# Altium PCB Roll_Paper_Motor.PcbDoc
Units mm, origin at the board's own origin, x right, y up, seen from the top; angles counter-clockwise.
Board outline 90.2 x 60.2 mm, 2 copper layers (Top Layer, Bottom Layer); 80 components, 43 nets, 263 pads, 230 vias.
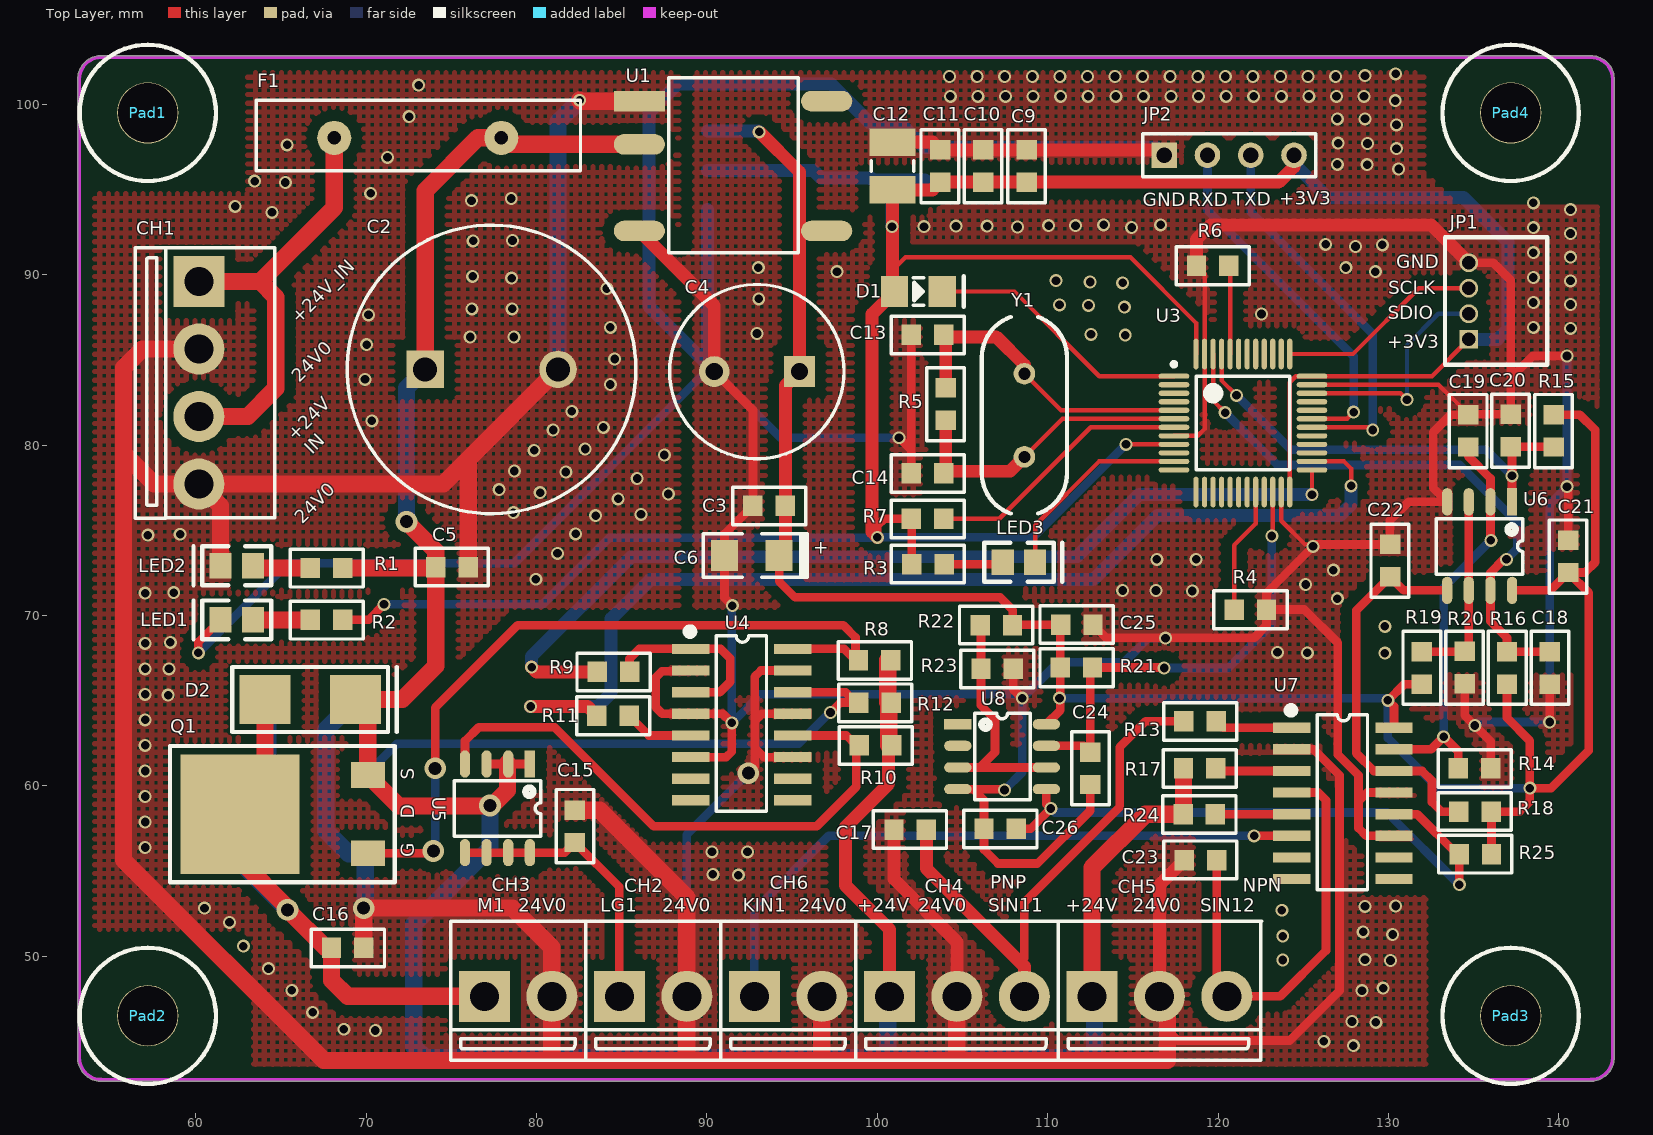
[diagram p0: Top Layer view]
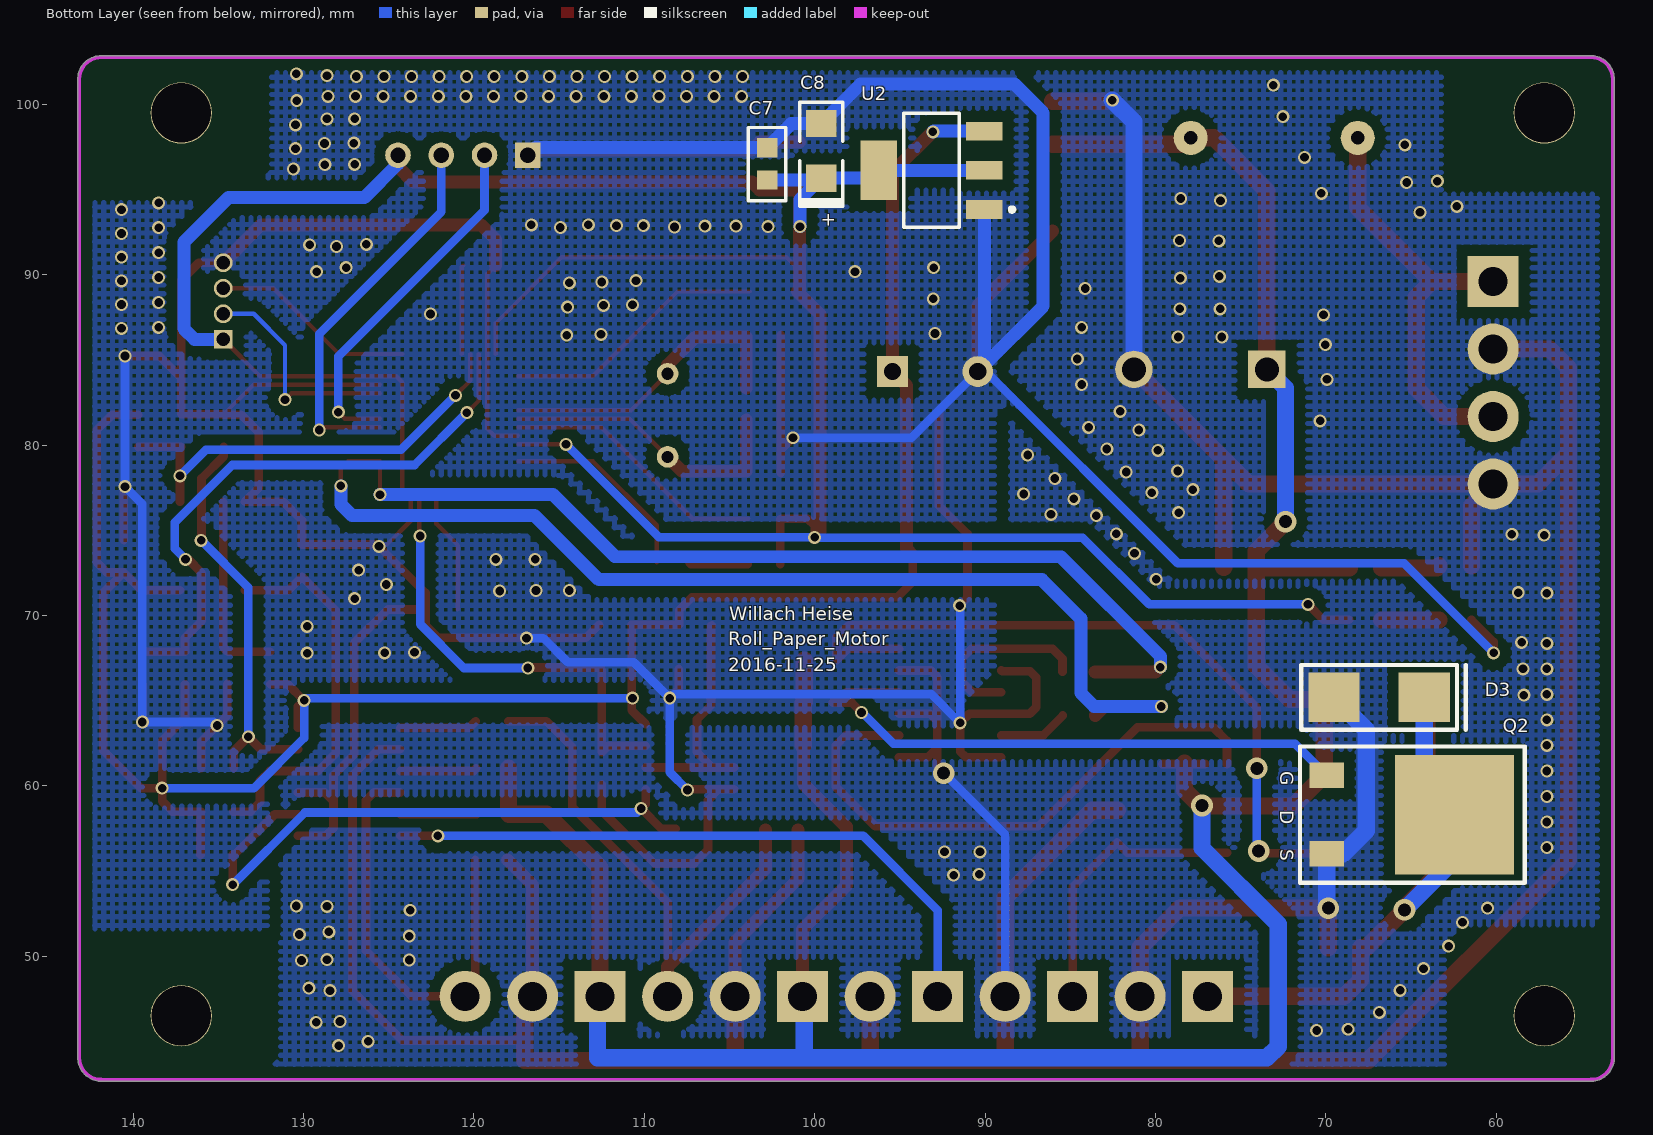
[diagram p1: Bottom Layer view, seen from below]

## Layer stack, top to bottom
Top Solder: solder mask 0.0102, Solder Resist, Dk 3.5
Top Layer: signal copper 0.0356
Dielectric 1: dielectric 0.32, FR-4, Dk 4.8
Bottom Layer: signal copper 0.0356
Bottom Solder: solder mask 0.0102, Solder Resist, Dk 3.5

## Board outline
53.062,43.891 53.062,101.575 cw(c53.162,101.575) 53.066,101.603 cw(c54.432,101.498) 54.26,102.858 cw(c54.305,102.768) 54.305,102.869 141.884,102.869 cw(c141.884,101.498) 143.253,101.566 cw(c143.162,101.524) 143.262,101.524 143.262,44.018 cw(c143.162,44.018) 143.253,43.976 cw(c141.884,44.044) 142.037,42.682 cw(c141.986,42.768) 141.986,42.668 54.432,42.668 cw(c54.432,42.768) 54.399,42.674 cw(c54.432,44.044) 53.077,43.837 cw(c53.162,43.891)

## Design rules (kind name [scope] priority, off if disabled: settings)
Clearance Clearance_1 [InPolygon] p1: gap=0.635
Clearance [All] p2: gap=0.178
ComponentClearance [All] p1: gap=0 collisioncheckmode=3 verticalgap=0 showdistances=FALSE
PolygonConnect [All] p1: connectstyle=Direct reliefconductorwidth=0.254 reliefentries=4 polygonreliefangle="90 Angle" airgapwidth=0.254
RoutingVias [All] p1: holewidth=0.711 width=1.27 viastyle="Through Hole" minholewidth=0.711 minwidth=1.27 maxholewidth=0.711 maxwidth=1.27
SolderMaskExpansion [All] p1: expansion=0.102
Width [All] p1: maxlimit=1.524 minlimit=0.254 preferedwidth=1.524
28 further rules are at their usual default settings.

## Classes and differential pairs
component class senror_input: C17 C18 C19 C20 C21 C22 C23 C24 C25 C26 CH4 CH5 CH6 R13 R14 R15 R16 R17 R18 R19 R20 R21 R22 R23 R24 R25 U6 U7 U8
component class roll_paper_output: C15 C16 CH2 CH3 D2 D3 Q1 Q2 R8 R9 R10 R11 R12 U4 U5
component class power_cpu: C2 C3 C4 C5 C6 C7 C8 C9 C10 C11 C12 C13 C14 CH1 D1 F1 JP1 JP2 LED1 LED2 LED3 Pad1 Pad2 Pad3 Pad4 R1 R2 R3 R4 R5 R6 R7 U1 U2 U3 Y1

## Components (designator, comment, footprint, x,y, rotation, side; value= is the part's Value field where it differs from the comment)
C2 "C_2200uF" C7.8*17 73.457,84.455 r0 top
C3 "Cap" 0805 93.65,76.454 r0 top
C4 "C_2200uF" C5*10 95.428,84.328 r180 top
C5 "Cap" 0805 75.032,72.847 r180 top
C6 "Cap Pol3" "CAP A-3216" 92.634,73.533 r180 top
C7 "Cap" 0805 102.794,96.52 r270 bottom
C8 "Cap Pol3" "CAP A-3216" 99.619,97.282 r90 bottom
C9 "Cap" 0805 108.763,96.393 r270 top
C10 "Cap" 0805 106.223,96.393 r270 top
C11 "Cap" 0805 103.683,96.393 r270 top
C12 "Cap Pol1" 3225[1210] 100.889,96.393 r90 top
C13 "Cap" 0805 102.951,86.487 r0 top
C14 "Cap" 0805 102.951,78.359 r0 top
C15 "Cap" 0805 82.245,57.633 r90 top
C16 "Cap" 0805 68.91,50.495 r0 top
C17 "Cap" 0805 101.93,57.429 r180 top
C18 "Cap" 0805 139.471,66.929 r90 top
C19 "Cap" 0805 134.696,80.848 r270 top
C20 "Cap" 0805 137.185,80.874 r270 top
C21 "Cap" 0805 140.564,73.482 r270 top
C22 "Cap" 0805 130.099,73.228 r270 top
C23 "Cap" 0805 118.974,55.651 r180 top
C24 "Cap" 0805 112.497,61.036 r90 top
C25 "Cap" 0805 111.709,69.469 r180 top
C26 "Cap" 0805 107.213,57.48 r0 top
CH1 "HEADER1X4" CH3.96-4PIN 60.173,89.611 r270 top
CH2 "HEADER1X2" CH3.96-2PIN 84.861,47.65 r0 top
CH3 "HEADER1X2" CH3.96-2PIN 76.937,47.65 r0 top
CH4 "HEADER1X3" CH3.96-3PIN 100.711,47.65 r0 top
CH5 "HEADER1X3" CH3.96-3PIN 112.598,47.65 r0 top
CH6 "HEADER1X2" CH3.96-2PIN 92.786,47.65 r0 top
D1 "Diode 1N4148" LL34 101.016,89.027 r0 top
D2 "1N5822(SS34)" SMA 64.059,65.075 r0 top
D3 "1N5822(SS34)" SMA 69.52,65.202 r180 bottom
F1 "X30_UF500" X30UF600 68.123,98.044 r0 top
JP1 "4 HEADER" CON4_1.5 134.722,88.468 r90 top
JP2 "4 HEADER" HDR1X4 116.84,97.028 r0 top
LED1 "" LED-0805 63.348,69.748 r180 top
LED2 "" LED-0805 63.348,72.923 r180 top
LED3 "" LED-0805 107.366,73.127 r0 top
Pad1 "Pad" pad35 57.15,99.509 r0 top
Pad2 "Pad" pad35 57.15,46.507 r0 top
Pad3 "Pad" pad35 137.155,46.507 r0 top
Pad4 "Pad" pad35 137.155,99.509 r0 top
Q1 "FR5305 (PMOS-2)" TO-252 66.345,58.344 r90 top
Q2 "FR4105 (NMOS-2)" TO-252 66.192,58.318 r270 bottom
R1 "Res2" 0805 67.666,72.796 r0 top
R2 "Res2" 0805 67.666,69.748 r0 top
R3 "Res2" 0805 102.976,73.025 r180 top
R4 "Res2" 0805 121.895,70.358 r0 top
R5 "Res2" 0805 104.018,82.423 r270 top
R6 "Res2" 0805 119.685,90.551 r0 top
R7 "Res2" 0805 102.951,75.692 r0 top
R8 "Res2" 0805 99.847,67.386 r0 top
R9 "Res2" 0805 84.506,66.7 r0 top
R10 "Res2" 0805 99.898,62.382 r0 top
R11 "Res2" 0805 84.48,64.135 r0 top
R12 "Res2" 0805 99.873,64.897 r0 top
R13 "Res2" 0805 118.948,63.805 r0 top
R14 "Res2" 0805 135.052,61.036 r0 top
R15 "Res2" 0805 139.7,80.848 r270 top
R16 "Res2" 0805 136.965,66.929 r90 top
R17 "Res2" 0805 118.923,61.036 r0 top
R18 "Res2" 0805 135.077,58.496 r180 top
R19 "Res2" 0805 131.953,66.929 r90 top
R20 "Res2" 0805 134.485,66.954 r270 top
R21 "Res2" 0805 111.684,66.954 r0 top
R22 "Res2" 0805 106.985,69.444 r180 top
R23 "Res2" 0805 107.036,66.878 r0 top
R24 "Res2" 0805 118.897,58.344 r0 top
R25 "Res2" 0805 135.103,55.982 r180 top
U1 "B2405XT-2WR2" B2405XT-2WR2 86.03,100.203 r0 top
U2 "AMS1117-3.3" SOT223 93.142,96.139 r90 bottom
U3 "STM32F103C8T6" LQFP48 121.463,81.305 r0 top
U4 "TLP280-4" SO16 92.05,63.602 r0 top
U5 "CEM4435A" SOP8-OP27 79.604,61.29 r270 top
U6 "LM293" SOP8-OP27 137.262,76.683 r270 top
U7 "TLP280-4" SO16 127.33,58.979 r0 top
U8 "LM293" SOP8-OP27 104.724,63.627 r0 top
Y1 "8MHz" XTAL_US 108.636,84.201 r270 top

## Footprints (in the part's own frame and the unit in brackets; to place one, negate y for a bottom-side part, rotate by r counter-clockwise, add the part's x,y. Pads: shape width x height; smd on the part's side, far side on the other; paste and mask are expansions set on the pad)
0805 [mm] "1.14mm,1.2mm,3.05mm"
  rect 1.14x1.2 smd: 1(-0.95,0) 2(0.95,0)
  silkscreen extent -2.13,-1.12 2.16,1.09
3225[1210] [mm] "Chip Resistor; Body 3.2 x 2.5 mm (LxW typ)"
  rect 1.6x2.7 smd: 1(-1.4,0) 2(1.4,0)
  silkscreen extent -0.3,-1.25 0.3,1.25
B2405XT-2WR2 [mm]
  rect 3x1.2 smd: 1(0,0)
  oval 3x1.2 smd: 2(0,-2.54) 4(0,-7.62) 5(11,-7.62) 8(11,0)
  silkscreen extent 1.73,-8.89 9.32,1.37
C5*10 [mm]
  rect 1.8x1.8 hole 1: 1(0,0)
  round 1.8 hole 1: 2(5,0)
  silkscreen extent -2.62,-5.11 7.62,5.11
C7.8*17 [mm]
  rect 2.2x2.2 hole 1.4: 1(0,0)
  round 2.2 hole 1.4: 2(7.8,0)
  silkscreen extent -4.57,-8.47 12.37,8.47
"CAP A-3216" [mm]
  rect 1.6x1.8 smd: 1(-1.6,0) 2(1.6,0)
  silkscreen extent -3.25,-1.27 2.85,1.27
CH3.96-2PIN [mm]
  rect 3x3 hole 1.7: 1(0,0)
  round 3 hole 1.7: 2(3.96,0)
  silkscreen extent -1.98,-3.76 5.94,4.42
CH3.96-3PIN [mm]
  rect 3x3 hole 1.7: 1(0,0)
  round 3 hole 1.7: 2(3.96,0) 3(7.92,0)
  silkscreen extent -1.98,-3.76 9.98,4.42
CH3.96-4PIN [mm]
  rect 3x3 hole 1.7: 1(0,0)
  round 3 hole 1.7: 2(3.96,0) 3(7.92,0) 4(11.887,0)
  silkscreen extent -1.98,-3.73 13.89,4.45
CON4_1.5 [mm]
  rect 1.1x1.1 hole 0.8: 1(-2.25,0)
  round 1.1 hole 0.8: 2(-0.75,0) 3(0.75,0) 4(2.25,0)
  silkscreen extent -3.75,-4.6 3.75,1.4
HDR1X4 [mm]
  rect 1.5x1.5 hole 0.9: 1(0,0)
  round 1.5 hole 0.9: 2(2.54,0) 3(5.08,0) 4(7.62,0)
  silkscreen extent -1.27,-1.27 8.89,1.27
LED-0805 [mm]
  rect 1.3x1.5 smd: 1(0,0) 2(1.9,0)
  silkscreen extent -1.08,-1.14 3.49,1.14
LL34 [mm]
  rect 1.6x1.8 smd: 1(0,0) 2(2.8,0)
  silkscreen extent 1.1,-0.89 4.07,0.89
LQFP48 [mm]
  oval 1.8x0.3 smd: 1(-4.05,2.75) 2(-4.05,2.25) 3(-4.05,1.75) 4(-4.05,1.25) 5(-4.05,0.75) 6(-4.05,0.25) 7(-4.05,-0.25) 8(-4.05,-0.75) 9(-4.05,-1.25) 10(-4.05,-1.75) 11(-4.05,-2.25) 12(-4.05,-2.75) 25(4.05,-2.75) 26(4.05,-2.25) 27(4.05,-1.75) 28(4.05,-1.25) 29(4.05,-0.75) 30(4.05,-0.25) 31(4.05,0.25) 32(4.05,0.75) 33(4.05,1.25) 34(4.05,1.75) 35(4.05,2.25) 36(4.05,2.75)
  oval 0.3x1.8 smd: 13(-2.75,-4.05) 14(-2.25,-4.05) 15(-1.75,-4.05) 16(-1.25,-4.05) 17(-0.75,-4.05) 18(-0.25,-4.05) 19(0.25,-4.05) 20(0.75,-4.05) 21(1.25,-4.05) 22(1.75,-4.05) 23(2.25,-4.05) 24(2.75,-4.05) 37(2.75,4.05) 38(2.25,4.05) 39(1.75,4.05) 40(1.25,4.05) 41(0.75,4.05) 42(0.25,4.05) 43(-0.25,4.05) 44(-0.75,4.05) 45(-1.25,4.05) 46(-1.75,4.05) 47(-2.25,4.05) 48(-2.75,4.05)
  silkscreen extent -4.17,-2.75 2.75,3.57, body extent -3.5,-3.5 3.5,3.5, height 1.6
pad35 [mm]
  round 3.6 hole 3.5: 1(0.025,0)
  silkscreen extent -3.97,-4 4.03,4
SMA [mm]
  rect 3x2.9 smd: 1(0,0) 2(5.3,0)
  silkscreen extent -1.92,-1.91 7.73,1.91
SO16 [mm] "Wide = 6mm"
  rect 2.2x0.6 smd: 1(-3,4.445) 2(-3,3.175) 3(-3,1.905) 4(-3,0.635) 5(-3,-0.635) 6(-3,-1.905) 7(-3,-3.175) 8(-3,-4.445) 9(3,-4.445) 10(3,-3.175) 11(3,-1.905) 12(3,-0.635) 13(3,0.635) 14(3,1.905) 15(3,3.175) 16(3,4.445)
  silkscreen extent -3.23,-5.08 1.45,5.64
SOP8-OP27 [mm]
  rect 1.6x0.6 smd: 1(0,0)
  oval 1.6x0.6 smd: 2(0,-1.27) 3(0,-2.54) 4(0,-3.81) 5(5.2,-3.81) 6(5.2,-2.54) 7(5.2,-1.27) 8(5.2,0)
  silkscreen extent 0.99,-4.44 4.24,0.64
SOT223 [mm] "SOT-223/SC-73; 4 Leads; Body 6.7 x 7.3 mm, inc. leads (LxW max)"
  rect 1.1x2.15 smd: 1(-2.3,-3.1) 2(0,-3.1) 3(2.3,-3.1)
  rect 3.5x2.15 smd: 4(0,3.1)
  silkscreen extent -3.35,-4.85 3.35,1.63
TO-252 [mm]
  rect 1.5x2 smd: 1(-2.3,-3.75) 3(2.3,-3.75)
  rect 7x7 smd: 2(0,3.75)
  silkscreen extent -4,-5.32 4,7.87
X30UF600 [mm]
  round 2 hole 0.8: 1(0,0) 2(9.804,0)
  silkscreen extent -4.57,-1.93 14.45,2.21
XTAL_US [mil]
  round 50 hole 28: 1(0,0) 2(192.13,0)
  silkscreen extent -131,-98 323,98

## Part data
C3 C5 C7 C9 C10 C11 C13 C14 C15 C16 C17 C18 C19 C20 C21 C22 C23 C24 C25 C26: "Capacitor"
C6 C8: "Polarized Capacitor (Surface Mount)"
C12: "Polarized Capacitor (Radial)"
D1: "High Conductance Fast Diode"
D2 D3: library part "Diode 1N4148", "High Conductance Fast Diode"
F1: library part "Fuse 1", "Fuse"
JP1 JP2: "4 Pin Header"
LED1 LED2 LED3: library part LED2, "Typical RED, GREEN, YELLOW, AMBER GaAs LED"
Q1: library part PMOS-2, "P-Channel Power MOSFET"
Q2: library part NMOS-2, "N-Channel Power MOSFET"
R1 R2 R3 R4 R5 R6 R7 R8 R9 R10 R11 R12 R13 R14 R15 R16 R17 R18 R19 R20 R21 R22 R23 R24 R25: "Resistor"
U2: library part AMS1117-5
U4 U7: library part TLP521-4
Y1: library part XTAL, "Crystal Oscillator"

## Via types
v1: diameter 0.762, hole 0.508, Top Layer to Bottom Layer, 223 vias
v2: diameter 1.27, hole 0.762, Top Layer to Bottom Layer, 7 vias

## Nets (pads, with @x,y where several pads share a name; then routed paths per layer and width w, separated by ;. In a path a pad name is that pad's centre, name@x,y a point inside that pad or via, vN(x,y) a via of type N, cw(c..) or ccw(c..) an arc to the next point about the centre after c; other vN are vias at no path point)
24V0: C2.2 C5.1 C15.2 C16.2 C17.2 C23.2 CH1.2 CH1.4 CH2.2 CH3.2 CH4.2 CH5.2 CH6.2 D3.1 LED2.2 Q2.3 U1.1 U4.11 U4.13 U4.15 U7.2 | length 301.5
  Top Layer w0.508: v2(92.431,60.757) 92.812,61.138 92.812,62.23 ; U4.11 93.345,61.697 92.812,62.23 ; U4.13 93.218,64.237 92.812,63.83 ; U4.15 93.167,66.777 92.812,66.421 92.812,63.83 ; 117.018,45.695 117.653,45.06 124.206,45.06 127.127,47.981 127.127,60.63 125.603,62.154 U7.2 ; 92.812,62.23 92.812,63.83
  Top Layer w0.762: C17.2 100.98,54.544 104.671,50.853 CH4.2 ; CH5.2 116.558,54.186 C23.2
  Top Layer w1.016: CH1.2 56.848,85.651 55.753,84.557 55.753,79.527 ; LED2.2 61.448,76.449 CH1.4 ; C16.2 69.86,52.822 v2(69.85,52.832) 78.588,52.832 80.897,50.523 CH3.2 80.897,44.046 81.051,43.891 ; C5.1 75.982,79.18 ; C2.2 75.982,79.18 ; C15.2 83.708,58.583 88.821,53.469 CH2.2 88.821,44.071 89.002,43.891 ; v1(82.525,100.254) 82.575,100.203 U1.1 ; CH6.2 96.746,44.198 97.053,43.891 ; CH4.2 104.671,44.173 104.953,43.891 ; CH5.2 117.018,47.191 117.018,45.695 117.018,43.891 104.953,43.891 ; 55.753,79.527 57.556,77.724 CH1.4 ; 55.753,79.527 55.753,55.651 67.513,43.891 81.051,43.891 ; CH1.4 74.526,77.724 75.982,79.18 ; 81.051,43.891 89.002,43.891 ; 89.002,43.891 97.053,43.891 ; 97.053,43.891 104.953,43.891
  Bottom Layer w0.508: CH2.2 88.821,57.148 v2(92.431,60.757)
  Bottom Layer w1.016: D3.1 67.615,63.297 67.615,57.379 68.975,56.018 Q2.3 69.942,52.924 v2(69.85,52.832) ; C2.2 81.257,98.986 v1(82.525,100.254)
  other v1: 127.94,44.755 126.213,45.009 70.536,45.644 68.682,45.72 129.261,46.126 127.864,46.177 66.853,46.711 128.448,47.981 65.634,48.006 129.692,48.133 64.262,49.276 130.124,49.759 123.8,49.784 128.626,49.809 62.789,50.597 123.8,51.181 130.251,51.283 128.524,51.435 61.976,51.994 123.749,52.705 60.503,52.832 128.626,52.934 130.429,52.959 91.846,54.762 90.348,54.813 90.297,56.134 92.38,56.134 57.023,56.388 57.023,57.887 57.023,59.385 57.023,60.884 57.023,62.382 57.023,63.881 58.369,65.329 57.023,65.38 57.023,66.878 58.42,66.878 57.023,68.377 58.496,68.428 57.023,71.323 58.699,71.349 79.959,72.136 81.229,73.66 57.175,74.727 59.08,74.778 82.296,74.803 83.464,75.87 86.131,75.946 78.638,76.048 84.785,76.86 87.732,77.14 80.213,77.216 77.8,77.394 85.903,78.054 81.712,78.435 78.689,78.486 87.503,79.426 79.858,79.705 82.855,79.781 80.975,80.899 83.922,81.051 70.333,81.432 82.067,81.991 84.328,83.566 69.926,83.871 84.582,85.065 70.028,85.903 76.098,86.36 78.664,86.36 84.328,86.919 70.129,87.655 76.2,88.011 78.562,88.011 84.125,89.205 78.537,89.814 76.251,89.916 76.276,91.999 78.588,92.024 64.465,93.675 62.306,94.031 76.175,94.361 78.511,94.488 70.256,94.793 65.253,95.428 63.449,95.504 71.247,96.901 65.354,97.638 72.517,99.289 73.076,101.143
+3.3V: C7.2 C8.1 C9.2 C10.2 C11.2 C12.1 D1.1 JP1.1 JP2.4 R2.2 R3.2 R7.1 U2.2 U2.4 U3.9 U3.24 U3.36 U3.48 | length 182.9
  Top Layer w0.254: 100.889,90.272 101.651,91.034 114.859,91.034 118.713,87.18 U3.48 ; v1@114.579,80.035 v1(114.599,80.055) U3.9 ; U3.24 124.213,83.7 124.568,84.055 U3.36 132.559,84.055 JP1.1
  Top Layer w0.508: R2.2 70.129,69.748 v1(71.044,70.663) ; v1(100,74.6) 100,75.286 100.406,75.692 R7.1 102.026,75.667 R3.2
  Top Layer w0.762: v1(100,74.6) 99.695,74.905 99.695,87.706 D1.1 100.889,89.154 100.889,90.272 C12.1 103.233,94.993 C11.2 C10.2 C9.2 123.561,95.443 124.46,96.342 JP2.4
  Bottom Layer w0.508: v1(71.044,70.663) 80.366,70.663 84.277,74.574 99.974,74.574 v1(100,74.6) 109.144,74.6 v1(114.599,80.055)
  Bottom Layer w0.762: U2.2 U2.4 96.699,95.682 C8.1 C8.1@99.731,95.57 ; v1(100.863,92.837) 100.863,94.437 C8.1@99.731,95.57 ; C7.2 C8.1@99.731,95.57 ; JP2.4 124.46,96.52 126.441,94.539 134.417,94.539 137.033,91.923 137.033,86.843 136.409,86.218 JP1.1
+5V: C3.2 C4.1 C6.1 C21.2 C25.2 R15.1 R16.1 R18.1 R19.1 R21.1 R22.1 R25.1 U1.5 U2.3 U6.8 U7.16 U8.8 | length 134.3
  Top Layer w0.508: C6.1 94.234,72.009 95.174,71.069 107.213,71.069 107.96,70.322 107.96,69.469 C25.2 110.734,69.444 R21.1 110.734,64.437 U8.8 ; U7.16 130.33,64.666 v1(129.972,65.024) 130.927,65.979 R19.1 ; R25.1 136.053,58.471 R18.1 137.693,58.496 138.303,59.106 v1(138.303,59.868) ; R16.1 136.965,64 138.303,62.662 v1(138.303,59.868) ; U6.8 139.514,71.483 C21.2 ; R15.1 141.239,81.798 142.138,80.899 142.138,73.127 141.544,72.532 C21.2 ; v1(138.303,59.868) 139.548,59.868 141.757,62.078 141.757,71.338 C21.2
  Top Layer w0.762: v1(93.066,98.4) 95.428,96.037 C4.1 94.6,83.5 C3.2 94.6,73.899 C6.1
  Bottom Layer w0.508: v1(110.693,65.151) 129.845,65.151 v1(129.972,65.024) 129.972,62.814 132.918,59.868 v1(138.303,59.868)
  Bottom Layer w0.762: U2.3 93.026,98.439 v1(93.066,98.4)
+24V: C2.1 C5.2 CH4.1 CH5.1 D2.2 F1.2 Q1.3 R1.2 R8.2 R10.2 R12.2 R17.1 R24.1 U1.2 U5.1 U5.2 U5.3 | length 174.6
  Top Layer w0.508: U5.3 78.293,61.29 U5.2 U5.1
  Top Layer w0.762: R10.2@100.67,62.382 100.67,60.132 98.146,57.607 98.146,54.153 100.711,51.587 CH4.1
  Top Layer w1.016: R1.2 74.031,72.796 C5.2 ; v2(72.365,75.514) 74.082,73.797 C5.2 ; C2.1 73.457,94.945 76.556,98.044 F1.2 78.308,97.663 U1.2 ; U5.2@78.293,61.331 78.293,61.29 78.293,59.751 77.368,58.826 71.912,58.826 Q1.3 70.095,64.339 D2.2 72.111,65.075 74.082,67.046 C5.2 ; R8.2@100.62,67.386 100.62,64.922 100.645,64.897 100.67,64.872 R10.2@100.67,62.382 ; CH5.1 112.598,55.194 115.748,58.344 R24.1 117.973,58.369 R17.1
  Bottom Layer w1.016: v2(72.365,75.514) 72.365,83.363 C2.1 ; v2(77.267,58.852) 77.267,56.363 72.796,51.892 72.796,44.704 73.457,44.044 100.609,44.044 ; CH4.1 100.609,47.549 100.609,44.044 ; CH5.1 112.751,47.498 112.751,44.044 100.609,44.044
+24V_IN: CH1.1 CH1.3 F1.1 | length 25.7
  Top Layer w1.016: CH1.3 63.048,81.691 64.694,83.337 64.694,88.697 63.779,89.611 ; CH1.1 63.779,89.611 ; F1.1 68.123,93.955 63.779,89.611
GND: C3.1 C4.2 C6.2 C7.1 C8.2 C9.1 C10.1 C11.1 C12.2 C13.1 C14.1 C18.1 C19.1 C20.1 C21.1 C22.1 C24.1 C25.1 C26.1 JP1.4 JP2.1 LED1.2 R4.2 R6.1 R14.2 R20.2 R23.2 U1.4 U2.1 U3.8 U3.23 U3.35 U3.47 U4.2 U4.4 U4.6 U6.4 U7.11 U7.13 U8.4 | length 386.4
  Top Layer w0.254: U3.8 118.808,80.555 119.213,80.96 U3.47 119.213,90.073 R6.1 ; U3.23 123.713,75.576 125.11,74.178 v1@125.689,74.178 ; U3.35 132.939,83.555 C19.1
  Top Layer w0.508: v1(60.147,67.818) 60.147,68.448 LED1.2 ; U4.6 91.135,61.697 91.465,62.027 v1(91.465,63.703) 90.932,64.237 U4.4 87.376,64.237 86.995,64.618 86.995,66.37 87.351,66.726 88.999,66.726 U4.2 ; C4.2 92.7,82.056 C3.1 91.034,74.788 C6.2 91.034,71.044 v1(91.491,70.587) ; v1(101.27,80.442) 102.001,79.711 ; C14.1 102.001,79.711 ; C13.1 102.001,79.711 ; U8.4 105.613,59.817 ; v1(107.467,59.766) 107.417,59.817 105.613,59.817 ; R23.2 107.986,65.674 v1(108.509,65.151) ; C24.1 112.497,58.547 109.398,55.448 107.086,55.448 106.263,56.271 C26.1 106.263,59.167 105.613,59.817 ; C25.1 113.421,68.707 122.123,68.707 122.845,69.428 R4.2 ; U7.11 128.702,57.074 128.245,57.531 128.245,59.106 ; U7.13 128.753,59.614 128.245,59.106 ; R20.2 134.485,64.143 v1(135.077,63.551) 136.002,62.626 R14.2 ; JP1.4 136.155,90.718 137.185,89.687 137.185,83.947 ; v1(139.471,63.754) C18.1 ; v1(140.487,77.572) 140.564,77.495 C21.1 ; v1(140.487,85.242) 138.481,85.242 137.185,83.947 ; R4.2 125.07,70.358 127.025,68.402 127.025,61.849 128.245,60.63 128.245,59.106 ; R4.2 122.845,71.333 125.689,74.178 C22.1 130.099,75.59 131.191,76.683 U6.4 132.639,77.495 132.639,80.772 133.665,81.798 C19.1 134.722,81.824 C20.1 137.185,83.947
  Top Layer w0.762: U1.4 90.428,88.185 C4.2 ; C12.2 103.233,97.793 C11.1 C10.1 C9.1 116.525,97.343 JP2.1 ; R6.1 118.735,92.09 119.583,92.939 132.501,92.939 JP1.4
  Bottom Layer w0.508: v1(60.147,67.818) 65.405,73.076 78.689,73.076 89.941,84.328 C4.2 94.314,80.442 v1(101.27,80.442) ; v1(91.491,70.587) 91.465,70.561 v1(91.465,63.703) 93.142,65.38 108.28,65.38 v1(108.509,65.151) ; v1(107.467,59.766) 108.509,60.808 v1(108.509,65.151) ; v1(116.916,68.682) 115.926,68.682 114.503,67.259 110.617,67.259 v1(108.509,65.151) ; v1(135.077,63.551) 135.28,63.754 v1(139.471,63.754) 139.471,76.556 v1(140.487,77.572) v1(140.487,85.242)
  Bottom Layer w0.762: U2.1 C4.2@90.042,84.714 ; C4.2 C4.2@90.042,84.714 ; JP2.1 116.398,97.47 C7.1 101.382,98.882 C8.2 97.307,101.194 88.265,101.194 86.589,99.517 86.589,88.167 C4.2@90.042,84.714
  other v1: 129.794,67.793 125.247,67.818 123.495,67.843 129.794,69.367 127,70.993 118.491,71.45 114.402,71.476 116.357,71.476 125.146,71.831 126.771,72.669 116.408,73.304 118.72,73.304 125.578,74.066 114.554,86.462 112.547,86.512 92.939,86.563 140.691,86.868 138.506,86.919 122.555,87.706 114.503,88.113 112.395,88.214 110.693,88.24 140.691,88.26 138.506,88.382 93.04,88.595 114.402,89.535 112.497,89.586 110.49,89.662 140.691,89.652 138.506,89.845 97.638,90.195 129.235,90.195 93.015,90.424 127.508,90.424 140.691,91.044 138.506,91.308 128.067,91.669 129.642,91.77 126.314,91.796 140.691,92.436 138.506,92.771 114.935,92.786 108.229,92.812 102.743,92.837 104.623,92.862 106.451,92.862 110.058,92.888 111.633,92.888 113.284,92.939 116.637,92.939 140.691,93.828 138.506,94.234 130.607,96.215 128.753,96.469 127,96.495 130.48,97.409 128.778,97.714 127.051,97.739 130.48,98.806 127,99.162 128.626,99.162 130.404,100.228 104.287,100.482 105.906,100.482 107.525,100.482 109.144,100.482 110.763,100.482 112.381,100.482 114,100.482 115.619,100.482 117.238,100.482 118.857,100.482 120.476,100.482 122.094,100.482 123.713,100.482 125.332,100.482 126.951,100.482 128.57,100.482 104.242,101.651 105.86,101.651 107.479,101.651 109.098,101.651 110.717,101.651 112.336,101.651 113.955,101.651 115.573,101.651 117.192,101.651 118.811,101.651 120.43,101.651 122.049,101.651 123.668,101.651 125.286,101.651 126.905,101.651 128.626,101.702 130.429,101.803
K1: C26.2 R25.2 U7.12 U8.5 | length 35.8
  Top Layer w0.508: C26.2 108.991,57.48 v1(110.185,58.674) ; v1@109.924,58.935 U8.5 ; U7.12 131.699,58.344 134.061,55.982 R25.2 134.153,54.214 v1(134.163,54.204)
  Bottom Layer w0.508: v1(110.185,58.674) 110.414,58.445 129.921,58.445 v1(134.163,54.204)
KIN1: CH6.1 U7.6 | length 38.4
  Top Layer w0.508: v1(122.123,57.074) U7.6
  Bottom Layer w0.508: CH6.1 92.786,52.705 97.155,57.074 v1(122.123,57.074)
LED1: LED3.2 U3.11 | length 11.9
  Top Layer w0.254: LED3.2 109.266,75.306 113.015,79.055 U3.11
LG1: C15.1 CH2.1 U5.5 U5.6 U5.7 U5.8 | length 16.8
  Top Layer w0.508: U5.5 U5.6 U5.7 U5.8 81.653,56.09 C15.1 84.861,54.066 CH2.1
M1: C16.1 CH3.1 D2.1 D3.2 Q1.2 Q2.2 | length 43.3
  Top Layer w1.016: D2.1 64.059,59.808 Q1.2 62.595,55.632 v2@65.438,52.789 ; v2(65.38,52.73) 67.615,50.495 C16.1 67.96,48.6 68.91,47.65 CH3.1
  Bottom Layer w1.016: D3.2 64.22,60.096 Q2.2 62.442,55.668 v2(65.38,52.73)
NetC13_2: C13.2 R5.1 U3.5 Y1.1 | length 18.5
  Top Layer w0.254: Y1.1 110.781,82.055 U3.5
  Top Layer w0.762: R5.1 104.018,86.37 106.975,86.37 108.636,84.709 Y1.1
NetC14_2: C14.2 R5.2 U3.6 Y1.2 | length 17.7
  Top Layer w0.254: Y1.2 110.87,81.555 U3.6
  Top Layer w0.762: R5.2 104.018,78.476 107.791,78.476 Y1.2
NetC18_2: C18.2 R16.2 U3.46 U6.7 | length 34.8
  Top Layer w0.254: U3.46 119.713,82.624 v1(120.421,81.915)
  Top Layer w0.508: v1(136.931,73.304) 136.779,73.304 135.992,72.517 U6.7 135.992,69.672 136.965,68.699 R16.2 C18.2
  Bottom Layer w0.508: v1(120.421,81.915) 123.495,78.842 134.188,78.842 137.566,75.463 137.566,73.939 v1(136.931,73.304)
NetC20_2: C20.2 R15.2 U3.45 U6.1 | length 26.7
  Top Layer w0.254: U3.45 120.213,83.8 v1(121.082,82.931)
  Top Layer w0.508: U6.1 v1(137.262,78.207) 137.262,79.847 C20.2 139.675,79.924 R15.2
  Bottom Layer w0.508: v1(121.082,82.931) 124.282,79.731 135.738,79.731 v1(137.262,78.207)
NetC24_2: C24.2 R21.2 U3.22 U8.7 | length 27.2
  Top Layer w0.254: v1@123.165,74.676 v1(123.162,74.679) 123.213,74.729 U3.22
  Top Layer w0.508: U8.7 112.126,62.357 C24.2 112.497,66.817 R21.2 116.84,66.954 v1(116.84,66.929)
  Bottom Layer w0.508: v1(116.84,66.929) 120.599,66.929 123.162,69.492 v1(123.162,74.679)
NetD1_2: D1.2 U3.1 | length 15.7
  Top Layer w0.254: D1.2 108.052,89.027 113.023,84.055 U3.1
NetLED1_1: LED1.1 R2.1 | length 3.4
  Top Layer w1.016: LED1.1 R2.1
NetLED2_1: LED2.1 R1.1 | length 3.4
  Top Layer w1.016: LED2.1 63.475,72.796 R1.1
NetLED3_1: LED3.1 R3.1 | length 3.5
  Top Layer w0.508: R3.1 107.264,73.025 LED3.1
NetQ1_1: Q1.1 R8.1 U4.16 | length 44.8
  Top Layer w0.508: Q1.1 73.798,56.044 v2(73.939,56.185) ; v2(74.041,61.036) 74.041,64.592 78.892,69.444 97.993,69.444 98.72,68.717 98.72,67.386 98.059,68.047 U4.16
  Bottom Layer w0.508: v2@73.736,56.058 74.041,56.363 v2(74.041,61.036)
NetQ2_1: Q2.1 R12.1 U4.14 | length 34.7
  Top Layer w0.508: U4.14 98.135,65.507 R12.1@98.745,64.897 ; v1(97.257,64.313) 97.841,64.897 R12.1@98.745,64.897 ; R12.1 R12.1@98.745,64.897
  Bottom Layer w0.508: Q2.1 71.808,62.484 95.377,62.484 97.206,64.313 v1(97.257,64.313)
NetR4_1: R4.1 U3.20 | length 7.4
  Top Layer w0.254: R4.1 120.945,74.132 122.213,75.401 U3.20
NetR6_2: R6.2 U3.44 | length 5.2
  Top Layer w0.254: R6.2 120.713,90.473 U3.44
NetR7_2: R7.2 U3.7 | length 15.7
  Top Layer w0.254: R7.2 107.163,75.692 112.526,81.055 U3.7
NetR9_1: R9.1 U3.25 | length 55.8
  Top Layer w0.254: v1@125.501,77.089 v1(125.513,77.1) U3.25
  Top Layer w0.762: v1(79.705,66.98) 79.985,66.7 R9.1
  Bottom Layer w0.762: v1(79.705,66.98) 79.705,67.615 85.547,73.457 111.709,73.457 115.353,77.1 v1(125.513,77.1)
NetR9_2: R9.2 U4.1 U4.3 | length 11.1
  Top Layer w0.508: R9.2 85.456,67.473 86.03,68.047 U4.1 90.805,68.047 91.364,67.488 91.364,66.116 90.754,65.507 U4.3
NetR10_1: R10.1 U4.12 U5.4 | length 34.4
  Top Layer w0.508: U5.4 75.794,62.636 76.606,63.449 81.051,63.449 86.868,57.633 96.444,57.633 98.77,59.959 98.77,62.382 98.186,62.967 U4.12
NetR11_1: R11.1 U3.26 | length 64.3
  Top Layer w0.254: U3.26 127.396,79.055 127.813,78.638 v1(127.813,77.622)
  Top Layer w0.762: v1(79.654,64.668) 82.997,64.668 R11.1
  Bottom Layer w0.762: v1(79.654,64.668) 83.591,64.668 84.379,65.456 84.379,69.825 86.665,72.111 112.674,72.111 116.434,75.87 127.152,75.87 127.813,76.53 v1(127.813,77.622)
NetR11_2: R11.2 U4.5 | length 4.1
  Top Layer w0.508: R11.2 86.599,62.967 U4.5
NetR13_2: R13.2 U7.1 | length 4.6
  Top Layer w0.508: R13.2 120.279,63.424 U7.1
NetR17_2: R17.2 U7.3 | length 4.5
  Top Layer w0.508: R17.2 120.025,60.884 U7.3
NetR19_2: R19.2 R20.1 U6.3 U6.6 | length 11.4
  Top Layer w0.508: R19.2 134.459,67.879 R20.1 134.722,68.141 U6.6 U6.3
NetR22_2: R22.2 R23.1 U8.3 U8.6 | length 14.3
  Top Layer w0.508: U8.3 106.02,61.087 ; R22.2 106.086,69.393 R23.1 106.086,64.729 106.909,63.906 106.909,61.976 106.02,61.087 ; U8.6 106.02,61.087
NetR24_2: R24.2 U7.5 | length 4.5
  Top Layer w0.508: R24.2 U7.5
RXD: JP2.2 U3.31 | length 21.3
  Top Layer w0.254: U3.31 127.58,81.555 v1(127.965,81.94)
  Bottom Layer w0.508: JP2.2 119.38,93.802 127.965,85.217 v1(127.965,81.94)
S11: C19.2 R14.1 U6.2 U7.15 | length 23.9
  Top Layer w0.508: U7.15 132.512,62.154 v1(133.248,62.89) 134.102,62.037 R14.1 ; C19.2 134.696,79.35 135.992,78.054 U6.2 v1@135.992,74.727 ; v1(136.017,74.422) v1@136.144,74.422
  Bottom Layer w0.508: v1(133.248,62.89) 133.248,71.653 v1(136.017,74.422)
S12: C22.2 R18.2 U6.5 U7.14 | length 23
  Top Layer w0.508: U6.5 130.894,71.483 C22.2 128.118,70.297 128.118,61.925 129.159,60.884 U7.14 131.978,60.884 132.563,60.3 132.563,59.055 133.121,58.496 R18.2
SIN11: C17.1 CH4.3 R13.1 | length 31.3
  Top Layer w0.508: 108.631,49.898 108.631,53.157 114.224,58.75 114.224,62.281 115.748,63.805 R13.1
  Top Layer w0.762: C17.1 102.88,55.159 108.631,49.408 CH4.3
SIN12: C23.1 CH5.3 U7.4 | length 26.2
  Top Layer w0.508: C23.1 119.924,48.245 CH5.3 123.647,47.65 126.34,50.343 126.34,59.157 125.882,59.614 U7.4
TCK/SWCLK: JP1.3 U3.37 | length 12.1
  Top Layer w0.254: U3.37 127.926,85.355 131.789,89.218 JP1.3
TMS/SWDIO: JP1.2 U3.34 | length 13.3
  Top Layer w0.254: U3.34 130.711,83.055 v1(131.089,82.677)
  Bottom Layer w0.254: v1(131.089,82.677) 131.089,85.877 132.93,87.718 JP1.2
TXD: JP2.3 U3.30 | length 22.7
  Top Layer w0.254: U3.30 128.926,81.055 v1(129.083,80.899)
  Bottom Layer w0.508: JP2.3 121.92,93.701 129.083,86.538 v1(129.083,80.899)
pads on no net: Pad1.1 Pad2.1 Pad3.1 Pad4.1 U1.8 U3.2 U3.3 U3.4 U3.10 U3.12 U3.13 U3.14 U3.15 U3.16 U3.17 U3.18 U3.19 U3.21 U3.27 U3.28 U3.29 U3.32 U3.33 U3.38 U3.39 U3.40 U3.41 U3.42 U3.43 U4.7 U4.8 U4.9 U4.10 U7.7 U7.8 U7.9 U7.10 U8.1 U8.2

## Polygon pours and split planes (outlines as drawn)
24V0 on Top Layer "Top Layer-No Net" (hatched 90Degree grid 0.508 track 0.305, remove dead copper, pour order 2): 62.89,102.768 63.068,102.591 88.494,102.591 88.494,68.58 91.745,65.329 91.897,65.176 111.404,65.176 125.501,65.176 128.524,62.154 132.207,58.471 132.207,43.637 132.207,42.723 132.131,42.647 63.373,42.647 63.373,50.978 63.297,51.054 60.858,53.492 55.55,53.492 53.416,53.492 52.857,52.934 53.264,53.34 53.264,93.294 62.306,93.294 62.967,93.955 63.043,94.031 63.043,102.514
24V0 on Top Layer "Top Layer-No Net" (hatched 90Degree grid 0.508 track 0.305, remove dead copper, pour order 4): 53.34,94.767 63.602,94.767 63.856,94.515 63.703,94.364 63.703,51.587 53.899,51.587 53.645,51.84 53.904,52.097 53.904,54.192
GND on Top Layer "Top Layer-No Net" (hatched 90Degree grid 0.508 track 0.305, remove dead copper, pour order 10): 87.249,103.073 131.775,103.073 132.08,102.768 132.08,95.885 132.232,95.885 134.137,93.98 142.951,93.98 142.951,51.943 143.256,51.638 143.104,51.791 131.699,51.791 131.699,52.324 128.753,55.27 129.515,56.032 129.515,62.408 89.484,62.408 89.306,62.586 88.214,63.678 87.808,63.678 87.808,102.591 87.782,102.616
24V0 on Bottom Layer "Top Layer-No Net" (hatched 90Degree grid 0.508 track 0.305, remove dead copper, pour order 6): 54.077,94.742 63.119,94.742 63.221,94.844 63.221,102.184 63.221,102.946 63.271,102.997 63.627,102.641 88.646,102.641 88.646,66.7 88.57,66.624 91.618,63.576 131.343,63.576 131.343,44.018 132.055,43.307 131.724,43.637 63.754,43.637 63.221,43.637 63.043,43.459 63.043,50.317 63.043,50.851 62.738,51.156 62.052,51.841 53.772,51.841 53.772,93.548 53.594,93.726
GND on Bottom Layer "Top Layer-No Net" (hatched 90Degree grid 0.508 track 0.305, remove dead copper, pour order 8): 87.249,102.794 87.325,102.87 131.877,102.87 131.877,96.063 132.359,95.58 133.706,94.234 138.938,94.234 142.697,94.234 143.256,93.675 143.104,93.523 143.104,51.613 131.877,51.613 131.572,51.918 129.565,53.924 129.565,62.408 89.103,62.408 89.027,62.484 87.579,63.932 87.579,102.565

## Keep-outs
Keep-Out Layer:
  lines w0.2: 53.162,43.891 53.162,101.575 ; 53.162,44.044 ccw(c54.432,44.044) 54.432,42.774 ; 53.162,101.498 cw(c54.432,101.498) 54.432,102.768 ; 54.305,102.768 141.884,102.768 ; 54.432,42.768 141.986,42.768 ; 141.707,102.768 141.884,102.768 ; 141.884,42.774 ccw(c141.884,44.044) 143.154,44.044 ; 143.154,101.448 143.154,101.498 ccw(c141.884,101.498) 141.884,102.768 ; 143.162,44.018 143.162,101.524

## Silkscreen, mask and mechanical layers (free items; w line width, h text height)
Top Overlay:
  text "+3V3" at 123.596,94.107 h0.8
  text "TXD" at 120.853,94.056 h0.8
  text "GND" at 115.57,94.031 h0.8
  text "RXD" at 118.262,94.031 h0.8
  text "GND" at 130.454,90.399 h0.8
  text "SCLK" at 129.997,88.875 h0.8
  text "SDIO" at 129.972,87.401 h0.8
  text "+24V_IN" at 66.04,87.071 h0.8 r45
  text "+3V3" at 129.921,85.7 h0.8
  text "24V0" at 66.065,83.642 h0.8 r45
  text "+24V" at 65.811,80.213 h0.8 r45
  text "IN" at 66.827,79.426 h0.8 r45
  text "24V0" at 66.243,75.336 h0.8 r45
  text "PNP" at 106.629,53.975 h0.8
  text "NPN" at 121.463,53.797 h0.8
  text "M1" at 76.505,52.629 h0.8
  text "24V0" at 78.918,52.629 h0.8
  text "LG1" at 83.744,52.629 h0.8
  text "24V0" at 87.376,52.629 h0.8
  text "KIN1" at 92.1,52.629 h0.8
  text "24V0" at 95.377,52.629 h0.8
  text "+24V" at 98.831,52.629 h0.8
  text "24V0" at 102.413,52.629 h0.8
  text "SIN11" at 106.502,52.629 h0.8
  text "+24V" at 111.074,52.629 h0.8
  text "24V0" at 114.986,52.629 h0.8
  text "SIN12" at 118.948,52.629 h0.8
Bottom Overlay:
  text "Willach Heise" at 105.004,69.723 h0.8
  text "Roll_Paper_Motor" at 105.08,68.25 h0.8
  text "2016-11-25" at 105.08,66.726 h0.8

## Text inside footprints (layer, text, board x,y; h text height)
C6: Top Overlay "+" at 97.155,74.295 h0.8 r180
C8: Bottom Overlay "+" at 98.857,92.761 h0.8 r270
Q1: Top Overlay "S" at 72.81,60.376 h0.8 r90; Top Overlay "D" at 72.81,58.09 h0.8 r90; Top Overlay "G" at 72.81,55.804 h0.8 r90
Q2: Bottom Overlay "S" at 72.657,56.286 h0.8 r90; Bottom Overlay "D" at 72.657,58.572 h0.8 r90; Bottom Overlay "G" at 72.657,60.858 h0.8 r90